# Altium PCB CSC002.pcbdoc (part 1 of 3)
Units mm, origin at the board's own origin, x right, y up, seen from the top; angles counter-clockwise.
Board outline 159.86 x 75.13 mm, 6 copper layers (Top Layer, Mid-Layer 1, Mid-Layer 2, GND, POWER, Bottom Layer), stack 2.494 mm thick; 78 components, 188 nets, 791 pads, 358 vias.
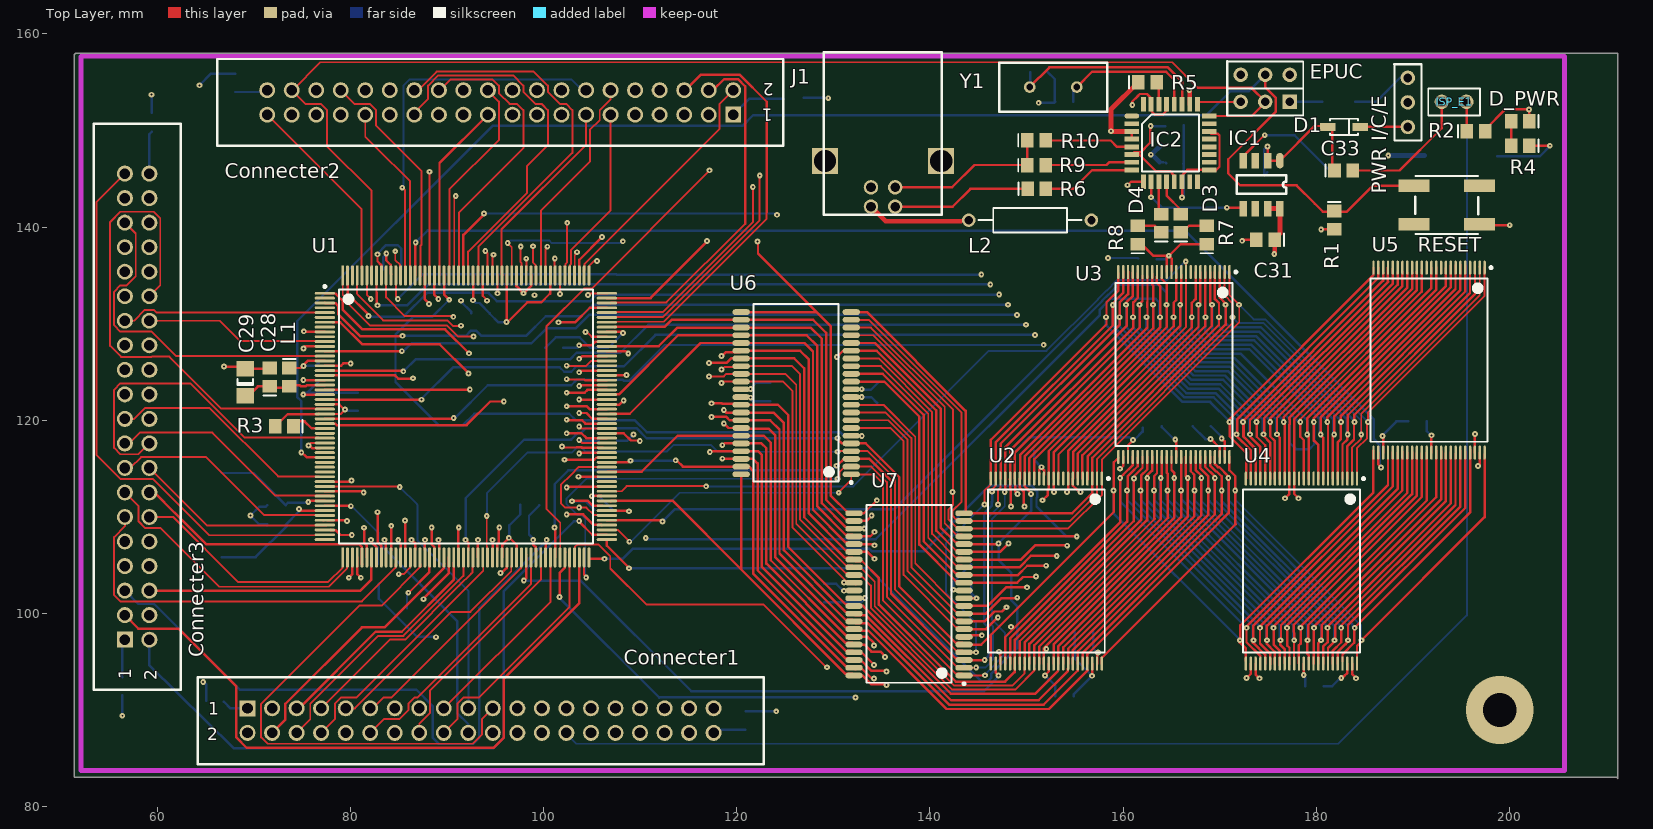
[diagram p0: Top Layer view]
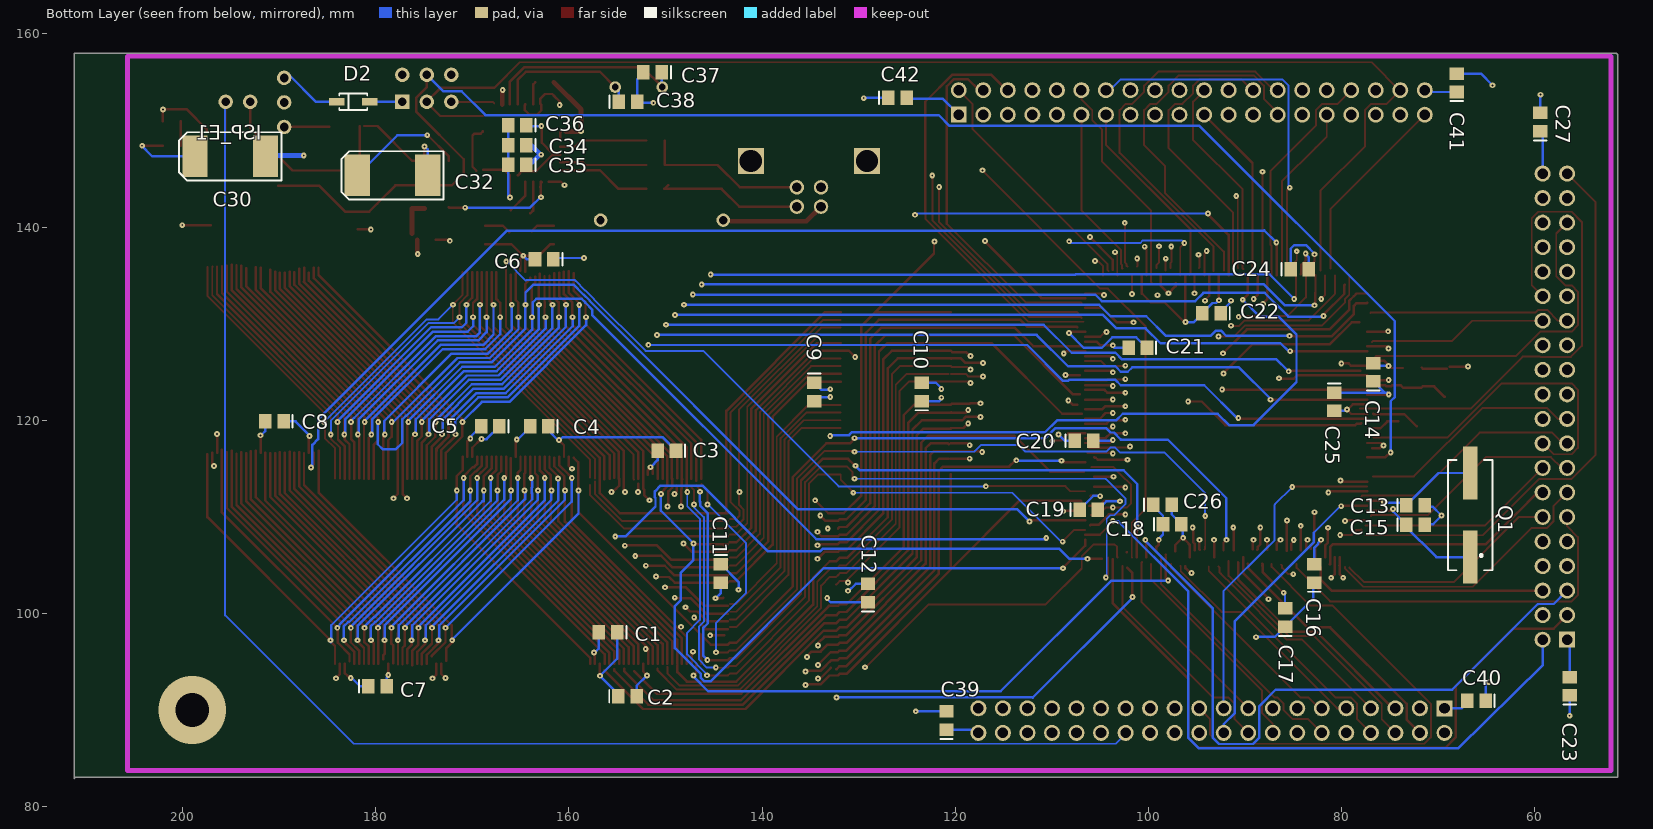
[diagram p1: Bottom Layer view, seen from below]
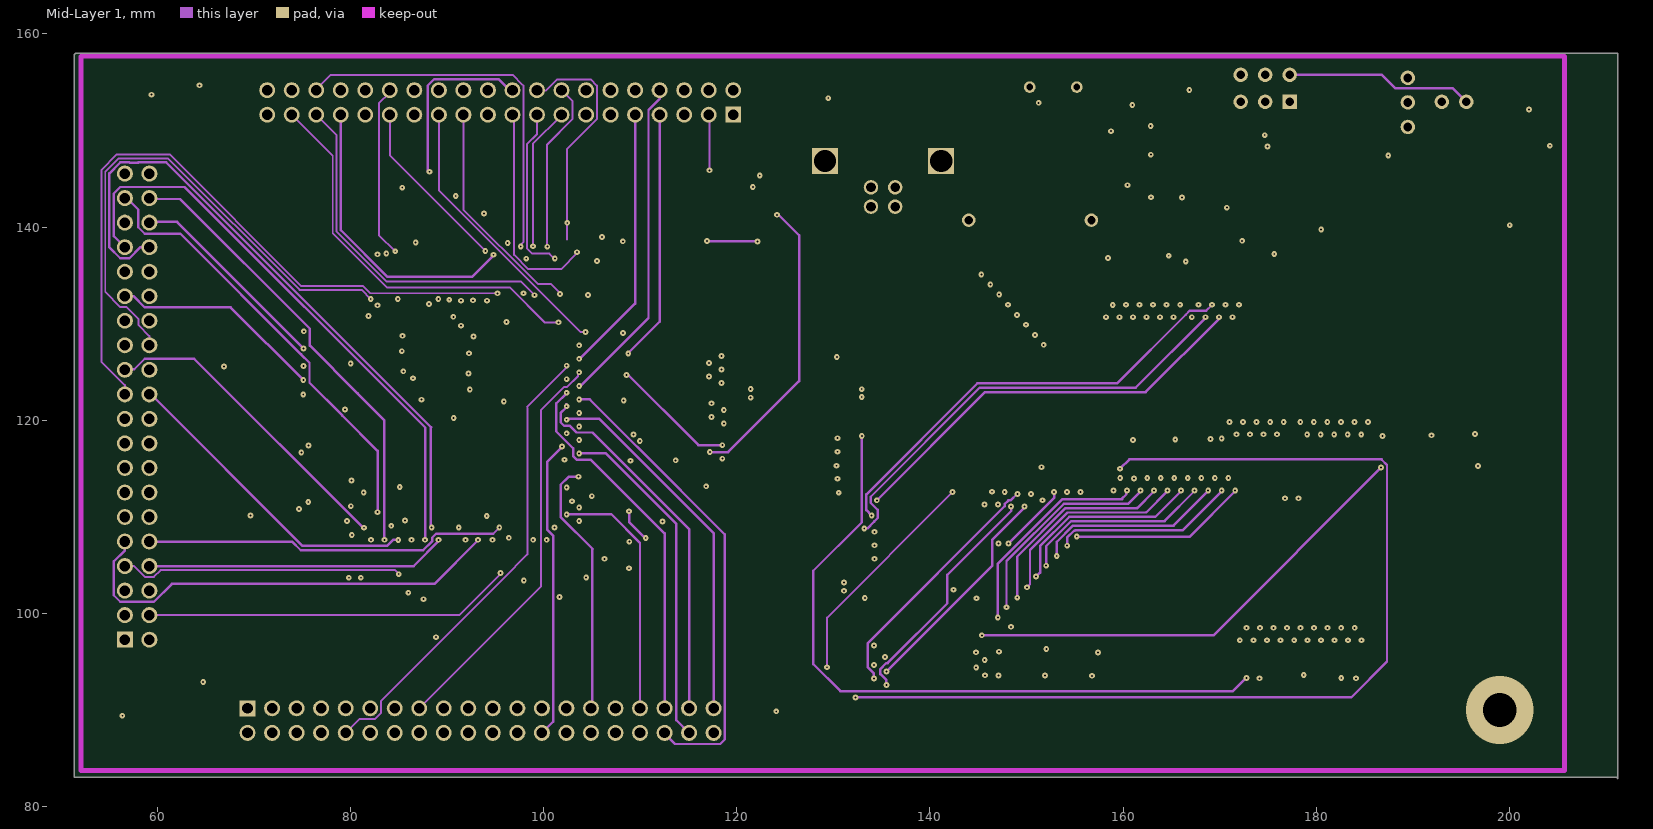
[diagram p2: Mid-Layer 1]
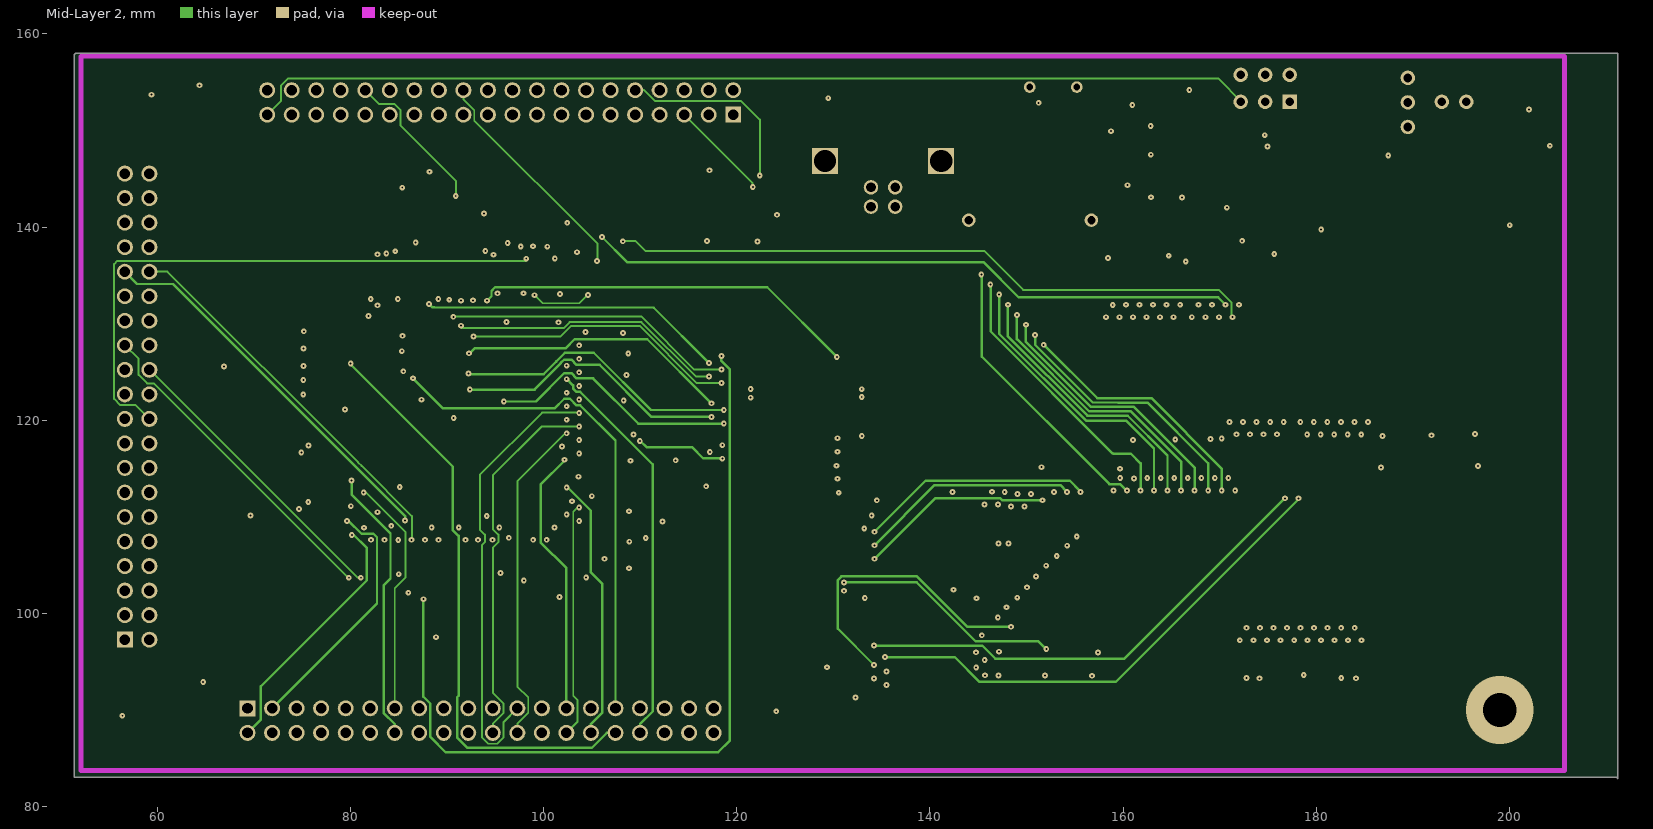
[diagram p3: Mid-Layer 2]
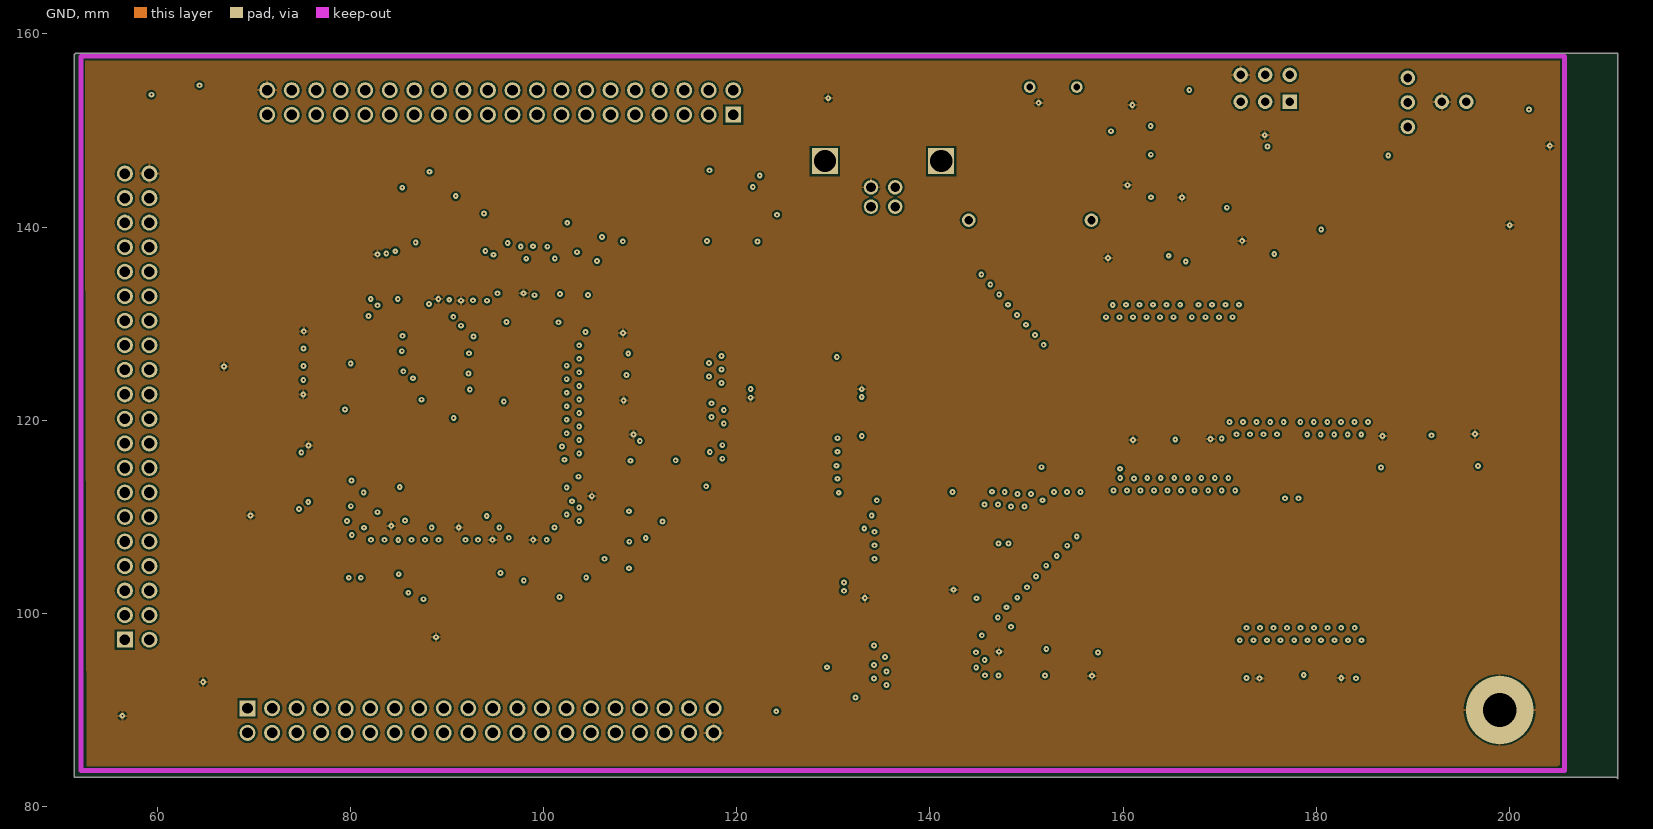
[diagram p4: GND]
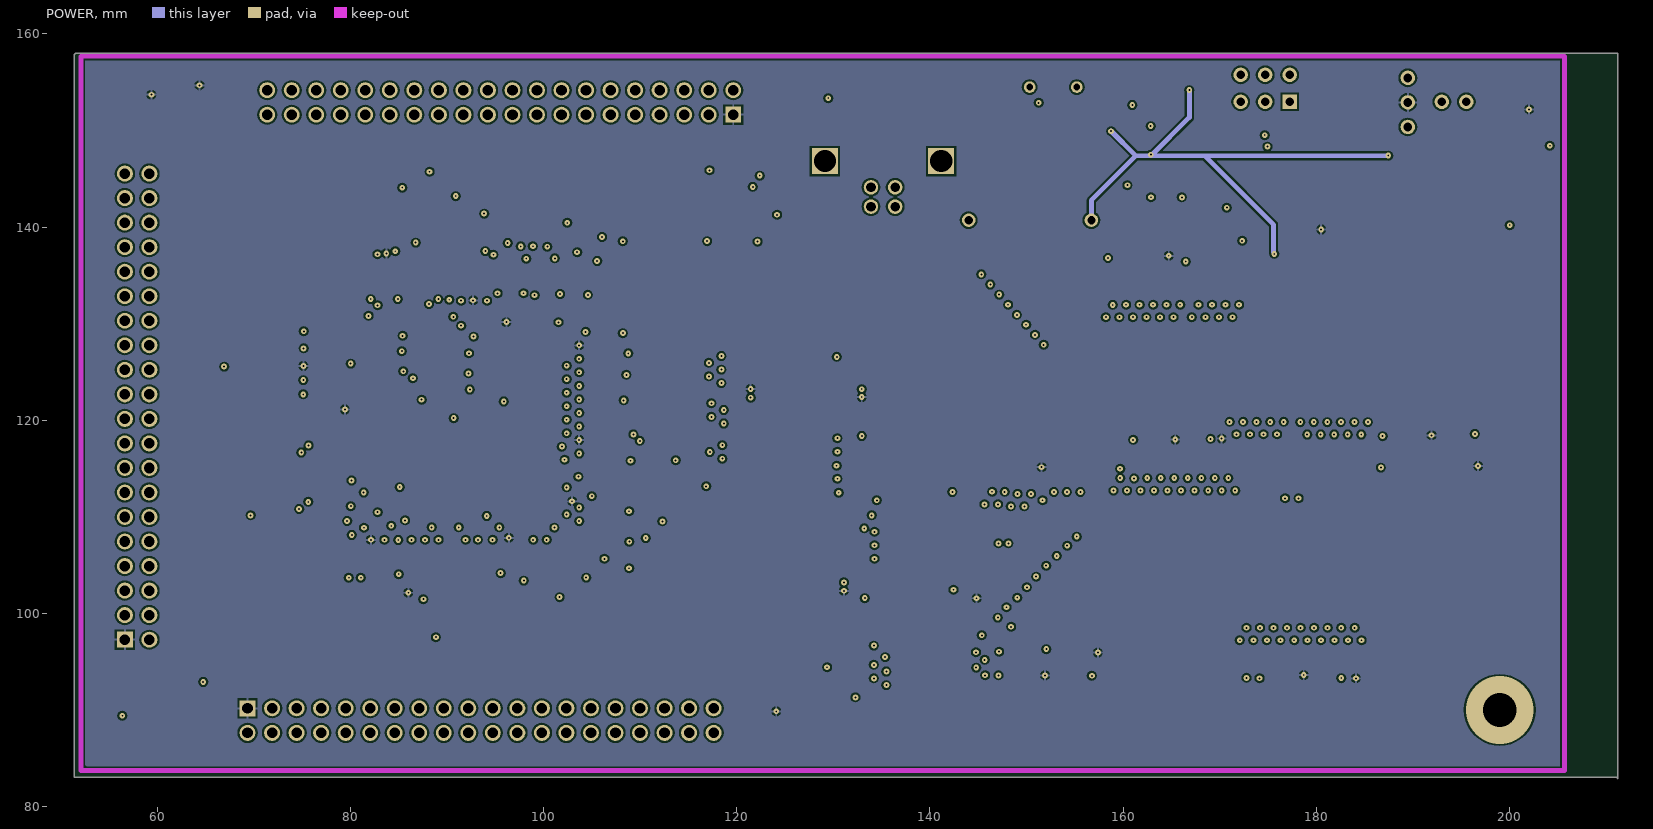
[diagram p5: POWER]

## Layer stack, top to bottom
Top Layer: signal copper 0.0356
Dielectric: core 0.32, FR-4, Dk 4.8
Mid-Layer 1: signal copper 0.0356
Dielectric: prepreg 0.32, FR-4, Dk 4.8
Mid-Layer 2: signal copper 0.0356
Dielectric: core 1, FR-4, Dk 4.8
GND: signal copper 0.0356
Dielectric: prepreg 0.32, FR-4, Dk 4.8
POWER: signal copper 0.0356
Dielectric: core 0.32, FR-4, Dk 4.8
Bottom Layer: signal copper 0.0356

## Board outline
51.38,157.84 51.55,158.01 211.24,158.01 211.24,82.88 211.07,83.05 51.38,83.05

## Design rules (kind name [scope] priority, off if disabled: settings)
Clearance [All] p1: gap=0.2
HoleSize [All] p1: absolutevalues=TRUE maxlimit=5 minlimit=0.2 maxpercent=80.000 minpercent=20.000
MinimumAnnularRing [All] p1: minimumring=0.2
MinimumSolderMaskSliver [All] p1: minsoldermaskwidth=0
PolygonConnect [All] p1: connectstyle=Relief reliefconductorwidth=0.254 reliefentries=4 polygonreliefangle="90 Angle"
RoutingLayers [All] p1: top layer_v5=TRUE mid layer 1_v5=FALSE mid layer 2_v5=FALSE mid layer 3_v5=FALSE mid layer 4_v5=FALSE bottom layer_v5=TRUE
RoutingVias [All] p1: holewidth=0.6 width=1 viastyle="Through Hole" minholewidth=0.15 minwidth=0.25 maxholewidth=5 maxwidth=5
SilkToSilkClearance [All] p1: silktosilkclearance=0.1
SilkscreenOverComponentPads [All] p1: minsilkscreentomaskgap=0
SolderMaskExpansion [All] p1: expansion=0.102
Width [All] p1: maxlimit=0.5 minlimit=0.2 preferedwidth=0.2
23 further rules are at their usual default settings.

## Classes and differential pairs
net class D.[0..15]: D.0 D.1 D.2 D.3 D.4 D.5 D.6 D.7 D.8 D.9 D.10 D.11 D.12 D.13 D.14 D.15
net class A.[0..20]: A.0 A.1 A.2 A.3 A.4 A.5 A.6 A.7 A.8 A.9 A.10 A.11 A.12 A.13 A.14 A.15 A.16 A.17 A.18 A.19 A.20
component class MicroController: C13 C14 C15 C16 C17 C18 C19 C20 C21 C22 C23 C24 C25 C26 C27 C28 C29 C39 C40 C41 C42 Connecter1 Connecter2 Connecter3 EPUC ISP_E1 L1 Q1 R1 R2 R3 RESET U1
component class "Memory bank": C1 C2 C3 C4 C5 C6 C7 C8 C9 C10 C11 C12 U2 U3 U4 U5 U6 U7
component class Power: C30 C31 C32 C33 D1 D2 D.1 D.2 D_PWR IC1 "PWR I/C/E" R4

## Components (designator, comment, footprint, x,y, rotation, side; value= is the part's Value field where it differs from the comment)
C1 "100nF" 0805 155.956,98.044 r0 bottom
C2 "100nF" 0805 153.924,91.44 r180 bottom
C3 "100nF" 0805 149.86,116.84 r0 bottom
C4 "100nF" 0805 163.068,119.38 r0 bottom
C5 "100nF" 0805 168.148,119.38 r0 bottom
C6 "100nF" 0805 162.56,136.652 r0 bottom
C7 "100nF" 0805 179.832,92.456 r180 bottom
C8 "100nF" 0805 190.5,119.888 r0 bottom
C9 "100nF" 0805 134.62,122.936 r270 bottom
C10 "100nF" 0805 123.444,122.936 r90 bottom
C11 "100nF" 0805 144.272,104.14 r270 bottom
C12 "100nF" 0805 129.032,102.108 r90 bottom
C13 "22pF" 0805 72.326,111.202 r180 bottom
C14 "100nF" 0805 76.708,124.968 r90 bottom
C15 "22pF" 0805 72.326,109.17 r180 bottom
C16 "100nF" 0805 82.804,104.14 r90 bottom
C17 "100nF" 0805 85.852,99.568 r90 bottom
C18 "100nF" 0805 97.536,109.22 r180 bottom
C19 "100nF" 0805 106.172,110.744 r180 bottom
C20 "100nF" 0805 106.68,117.856 r180 bottom
C21 "100nF" 0805 101.092,127.508 r0 bottom
C22 "100nF" 0805 93.472,131.064 r0 bottom
C23 "100nF" 0805 56.388,92.456 r90 bottom
C24 "100nF" 0805 84.328,135.636 r180 bottom
C25 "100nF" 0805 80.772,121.92 r270 bottom
C26 "100nF" 0805 98.552,111.252 r180 bottom
C27 "100nF" 0805 59.436,150.876 r90 bottom
C28 "100nF" 0805 71.628,124.46 r90 top
C29 "47uF/6.3V" 1206 69.088,123.952 r90 top
C30 "Cap Pol3" SMDD_E 195.072,147.32 r0 bottom
C31 "Cap Semi" 0805 174.752,138.684 r180 top
C32 "Cap Pol3" smdd_e 178.27,145.352 r0 bottom
C33 "Cap Semi" 0805 182.842,145.86 r0 top
C34 "100nF" 0805 165.35,148.494 r0 bottom
C35 "100nF" 0805 165.35,146.462 r0 bottom
C36 "33nF" 0805 165.35,150.526 r0 bottom
C37 "27pF" 0805 151.346,156.02 r0 bottom
C38 "27pF" 0805 153.886,152.972 r180 bottom
C39 "Cap" 0805 120.904,88.9 r90 bottom
C40 "Cap" 0805 66.04,90.932 r0 bottom
C41 "Cap" 0805 68.072,154.94 r90 bottom
C42 "Cap" 0805 125.984,153.416 r180 bottom
Connecter1 "Header 20X2" "40pins header" 93.472,88.9 r0 top
Connecter2 "Header 20X2" "40pins header" 95.504,152.908 r180 top
Connecter3 "Header 20X2" "40pins header" 57.912,121.412 r90 top
D1 "1N4148" SOD123 182.88,150.368 r0 top
D2 "1N4148" SOD123 182.334,152.972 r0 bottom
D3 "LED" 0805 165.986,140.396 r90 top
D4 "LED" 0805 163.954,140.396 r90 top
D_PWR "LED" 0805 201.13,150.94 r180 top (schematic designator PWR1)
EPUC "Header 3X2" "6pins header" 177.254,152.972 r180 top (schematic designator "Connecter 1")
IC1 "MIC5200" MIC5200-3.3BM 176.238,146.876 r270 top
IC2 "FT232BM" FT232BM 160.906,151.506 r0 top
ISP_E1 "2pins jumper" JUMPER2pins 195.542,152.972 r180 top
J1 "USB B-type" usb-b 136.396,142.124 r180 top
L1 "470nH" 0805 73.66,124.46 r270 top
L2 "Ferrite Bead" AXIAL-0.5 150.368,140.716 r180 top
"PWR I/C/E" "3pins jumper" JUMPER3pins 189.484,150.368 r90 top (schematic designator EXT/PWR1)
Q1 "12.000MHz" HC49/4H_SMX 66.672,110.186 r90 bottom
R1 "47K" 0805 181.864,140.716 r270 top
R2 "22K" 0805 196.558,149.924 r0 top
R3 "10K" 0805 73.152,119.38 r180 top
R4 "560" 0805 201.13,148.4 r180 top
R5 "470" 0805 162.522,155.004 r0 top
R6 "27" 0805 151.064,143.954 r0 top
R7 "220" 0805 168.656,139.192 r90 top
R8 "220" 0805 161.544,139.192 r90 top
R9 "27" 0805 151.046,146.428 r0 top
R10 "1k5" 0805 151.046,148.968 r0 top
RESET "SW-PB" E-BIP-P4/D10 193.51,142.304 r180 top (schematic designator RESET1)
U1 "LPC2468FBD208" SOT459-1_M 91.948,120.396 r0 top
U2 "TE28F320B3" TSOP48_L 152.054,104.382 r270 top
U3 "TE28F320B3" TSOP48_L 165.262,125.776 r270 top
U4 "CY62167DV30LL" TSOP48_L 178.47,104.382 r270 top
U5 "CY62167DV30LL" TSOP48_L 191.678,126.226 r270 top
U6 "FM22L16-55-TG" TSOP2-44_M 126.153,124.8 r180 top
U7 "FM22L16-55-TG" TSOP2-44_M 137.837,103.972 r180 top
Y1 "6MHz" HC49US 150.33,154.496 r0 top

## Footprints (in the part's own frame and the unit in brackets; to place one, negate y for a bottom-side part, rotate by r counter-clockwise, add the part's x,y. Pads: shape width x height; smd on the part's side, far side on the other; paste and mask are expansions set on the pad)
"6pins header" [mm]
  rect 1.5x1.5 hole 0.9: 1(0,0)
  round 1.5 hole 0.9: 2(2.54,0) 3(5.08,0) 4(0,-2.79) 5(2.54,-2.79) 6(5.08,-2.79)
  silkscreen extent -1.4,-4.19 6.48,1.4
"40pins header" [mm]
  rect 1.65x1.65 hole 1.1: 1(-24.13,1.27)
  round 1.65 hole 1.1: 2(-24.13,-1.27) 3(-21.59,1.27) 4(-21.59,-1.27) 5(-19.05,1.27) 6(-19.05,-1.27) 7(-16.51,1.27) 8(-16.51,-1.27) 9(-13.97,1.27) 10(-13.97,-1.27) 11(-11.43,1.27) 12(-11.43,-1.27) 13(-8.89,1.27) 14(-8.89,-1.27) 15(-6.35,1.27) 16(-6.35,-1.27) 17(-3.81,1.27) 18(-3.81,-1.27) 19(-1.27,1.27) 20(-1.27,-1.27) 21(1.27,1.27) 22(1.27,-1.27) 23(3.81,1.27) 24(3.81,-1.27) 25(6.35,1.27) 26(6.35,-1.27) 27(8.89,1.27) 28(8.89,-1.27) 29(11.43,1.27) 30(11.43,-1.27) 31(13.97,1.27) 32(13.97,-1.27) 33(16.51,1.27) 34(16.51,-1.27) 35(19.05,1.27) 36(19.05,-1.27) 37(21.59,1.27) 38(21.59,-1.27) 39(24.13,1.27) 40(24.13,-1.27)
  silkscreen extent -29.3,-4.5 29.3,4.5
0805 [mm] "Chip Capacitor; Body 2.0 x 1.2 mm (LxW typ)"
  rect 1.3x1.5 smd: 1(-0.95,0) 2(0.95,0)
  silkscreen extent -1.9,-0.65 -1.9,0.65
1206 [mm] "Chip Capacitor; Body 3.2 x 1.6 mm (LxW typ)"
  rect 1.6x1.8 smd: 1(-1.4,0) 2(1.4,0)
  silkscreen extent -0.3,-0.8 0.3,0.8
AXIAL-0.5 [mm] "Axial Device, Thru-Hole; 2 Leads; 0.5 in Pin Spacing"
  round 1.4 hole 0.85: 1(-6.35,0) 2(6.35,0)
  silkscreen extent -5.33,-1.27 5.33,1.27
E-BIP-P4/D10 [mm] "Bridge Rectifier; 4 Terminals; Body 9.4 x 9.4 mm (typ); Pitch 5.08 mm"
  rect 3.2x1.3 smd: 0(-3.4,-2) 0(3.4,2) 1(-3.4,2) 2(3.4,-2)
  silkscreen extent -3.25,-3 3.25,3
FT232BM [mm]
  oval 1.5x0.5 smd: 1(0,0)
  rect 1.5x0.5 smd: 2(0,-0.8) 3(0,-1.6) 4(0,-2.4) 5(0,-3.2) 6(0,-4) 7(0,-4.8) 8(0,-5.6) 17(8,-5.6) 18(8,-4.8) 19(8,-4) 20(8,-3.2) 21(8,-2.4) 22(8,-1.6) 23(8,-0.8) 24(8,0)
  rect 0.5x1.5 smd: 9(1.2,-6.8) 10(2,-6.8) 11(2.8,-6.8) 12(3.6,-6.8) 13(4.4,-6.8) 14(5.2,-6.8) 15(6,-6.8) 16(6.8,-6.8) 25(6.8,1.2) 26(6,1.2) 27(5.2,1.2) 28(4.4,1.2) 29(3.6,1.2) 30(2.8,1.2) 31(2,1.2) 32(1.2,1.2)
  silkscreen extent 1.03,-5.77 6.97,0.17
HC49/4H_SMX [mm]
  rect 5.5x1.5 smd: 1(-4.35,0) 2(4.35,0)
  silkscreen extent -5.71,-2.29 5.71,2.29
HC49US [mm]
  round 1.2 hole 0.7: 1(0,0) 2(4.88,0)
  silkscreen extent -3.15,-2.54 8.03,2.54
JUMPER2pins [mm]
  round 1.5 hole 0.9: 1(0,0) 2(2.54,0)
  silkscreen extent -1.4,-1.4 3.94,1.4
JUMPER3pins [mm]
  round 1.5 hole 0.9: 1(0,0) 2(2.54,0) 3(5.08,0)
  silkscreen extent -1.4,-1.4 6.48,1.4
MIC5200-3.3BM [mil]
  oval 62.99x30 smd: 1(0,0)
  rect 62.99x30 smd: 2(0,-50) 3(0,-100) 4(0,-150) 5(195,-150) 6(195,-100) 7(195,-50) 8(195,0)
  silkscreen extent 60,-175 135,25
SMDD_E [mm]
  rect 2.6x4.3 smd: 1(-3.65,0) 2(3.65,0)
  silkscreen extent -5.3,-2.5 5.3,2.5
smdd_e [mm]
  rect 2.6x4.3 smd: 1(-3.65,0) 2(3.65,0)
  silkscreen extent -5.3,-2.5 5.3,2.5
SOD123 [mm] "SOD-123; 2 Leads; Body 2.7 x 1.6 mm, (LxW)"
  rect 1.6x0.8 smd: 1(-1.7,0) 2(1.7,0)
  silkscreen extent -1.45,-0.85 1.45,0.85
SOT459-1_M [mm] "Thin QFP, 208-Leads, Body 28x28mm, Pitch 0.5mm, IPC Low Density"
  oval 2.1x0.3 smd: 1(-14.6,12.75) 2(-14.6,12.25) 3(-14.6,11.75) 4(-14.6,11.25) 5(-14.6,10.75) 6(-14.6,10.25) 7(-14.6,9.75) 8(-14.6,9.25) 9(-14.6,8.75) 10(-14.6,8.25) 11(-14.6,7.75) 12(-14.6,7.25) 13(-14.6,6.75) 14(-14.6,6.25) 15(-14.6,5.75) 16(-14.6,5.25) 17(-14.6,4.75) 18(-14.6,4.25) 19(-14.6,3.75) 20(-14.6,3.25) 21(-14.6,2.75) 22(-14.6,2.25) 23(-14.6,1.75) 24(-14.6,1.25) 25(-14.6,0.75) 26(-14.6,0.25) 27(-14.6,-0.25) 28(-14.6,-0.75) 29(-14.6,-1.25) 30(-14.6,-1.75) 31(-14.6,-2.25) 32(-14.6,-2.75) 33(-14.6,-3.25) 34(-14.6,-3.75) 35(-14.6,-4.25) 36(-14.6,-4.75) 37(-14.6,-5.25) 38(-14.6,-5.75) 39(-14.6,-6.25) 40(-14.6,-6.75) 41(-14.6,-7.25) 42(-14.6,-7.75) 43(-14.6,-8.25) 44(-14.6,-8.75) 45(-14.6,-9.25) 46(-14.6,-9.75) 47(-14.6,-10.25) 48(-14.6,-10.75) 49(-14.6,-11.25) 50(-14.6,-11.75) 51(-14.6,-12.25) 52(-14.6,-12.75) 105(14.6,-12.75) 106(14.6,-12.25) 107(14.6,-11.75) 108(14.6,-11.25) 109(14.6,-10.75) 110(14.6,-10.25) 111(14.6,-9.75) 112(14.6,-9.25) 113(14.6,-8.75) 114(14.6,-8.25) 115(14.6,-7.75) 116(14.6,-7.25) 117(14.6,-6.75) 118(14.6,-6.25) 119(14.6,-5.75) 120(14.6,-5.25) 121(14.6,-4.75) 122(14.6,-4.25) 123(14.6,-3.75) 124(14.6,-3.25) 125(14.6,-2.75) 126(14.6,-2.25) 127(14.6,-1.75) 128(14.6,-1.25) 129(14.6,-0.75) 130(14.6,-0.25) 131(14.6,0.25) 132(14.6,0.75) 133(14.6,1.25) 134(14.6,1.75) 135(14.6,2.25) 136(14.6,2.75) 137(14.6,3.25) 138(14.6,3.75) 139(14.6,4.25) 140(14.6,4.75) 141(14.6,5.25) 142(14.6,5.75) 143(14.6,6.25) 144(14.6,6.75) 145(14.6,7.25) 146(14.6,7.75) 147(14.6,8.25) 148(14.6,8.75) 149(14.6,9.25) 150(14.6,9.75) 151(14.6,10.25) 152(14.6,10.75) 153(14.6,11.25) 154(14.6,11.75) 155(14.6,12.25) 156(14.6,12.75)
  oval 0.3x2.1 smd: 53(-12.75,-14.6) 54(-12.25,-14.6) 55(-11.75,-14.6) 56(-11.25,-14.6) 57(-10.75,-14.6) 58(-10.25,-14.6) 59(-9.75,-14.6) 60(-9.25,-14.6) 61(-8.75,-14.6) 62(-8.25,-14.6) 63(-7.75,-14.6) 64(-7.25,-14.6) 65(-6.75,-14.6) 66(-6.25,-14.6) 67(-5.75,-14.6) 68(-5.25,-14.6) 69(-4.75,-14.6) 70(-4.25,-14.6) 71(-3.75,-14.6) 72(-3.25,-14.6) 73(-2.75,-14.6) 74(-2.25,-14.6) 75(-1.75,-14.6) 76(-1.25,-14.6) 77(-0.75,-14.6) 78(-0.25,-14.6) 79(0.25,-14.6) 80(0.75,-14.6) 81(1.25,-14.6) 82(1.75,-14.6) 83(2.25,-14.6) 84(2.75,-14.6) 85(3.25,-14.6) 86(3.75,-14.6) 87(4.25,-14.6) 88(4.75,-14.6) 89(5.25,-14.6) 90(5.75,-14.6) 91(6.25,-14.6) 92(6.75,-14.6) 93(7.25,-14.6) 94(7.75,-14.6) 95(8.25,-14.6) 96(8.75,-14.6) 97(9.25,-14.6) 98(9.75,-14.6) 99(10.25,-14.6) 100(10.75,-14.6) 101(11.25,-14.6) 102(11.75,-14.6) 103(12.25,-14.6) 104(12.75,-14.6) 157(12.75,14.6) 158(12.25,14.6) 159(11.75,14.6) 160(11.25,14.6) 161(10.75,14.6) 162(10.25,14.6) 163(9.75,14.6) 164(9.25,14.6) 165(8.75,14.6) 166(8.25,14.6) 167(7.75,14.6) 168(7.25,14.6) 169(6.75,14.6) 170(6.25,14.6) 171(5.75,14.6) 172(5.25,14.6) 173(4.75,14.6) 174(4.25,14.6) 175(3.75,14.6) 176(3.25,14.6) 177(2.75,14.6) 178(2.25,14.6) 179(1.75,14.6) 180(1.25,14.6) 181(0.75,14.6) 182(0.25,14.6) 183(-0.25,14.6) 184(-0.75,14.6) 185(-1.25,14.6) 186(-1.75,14.6) 187(-2.25,14.6) 188(-2.75,14.6) 189(-3.25,14.6) 190(-3.75,14.6) 191(-4.25,14.6) 192(-4.75,14.6) 193(-5.25,14.6) 194(-5.75,14.6) 195(-6.25,14.6) 196(-6.75,14.6) 197(-7.25,14.6) 198(-7.75,14.6) 199(-8.25,14.6) 200(-8.75,14.6) 201(-9.25,14.6) 202(-9.75,14.6) 203(-10.25,14.6) 204(-10.75,14.6) 205(-11.25,14.6) 206(-11.75,14.6) 207(-12.25,14.6) 208(-12.75,14.6)
  silkscreen extent -14.72,-13.15 13.15,13.57, body extent -14,-14 14,14, height 1.6
TSOP2-44_M [mm]
  oval 1.8x0.6 smd: 1(-5.7,10.4) 2(-5.7,9.6) 3(-5.7,8.8) 4(-5.7,8) 5(-5.7,7.2) 6(-5.7,6.4) 7(-5.7,5.6) 8(-5.7,4.8) 9(-5.7,4) 10(-5.7,3.2) 11(-5.7,2.4) 12(-5.7,1.6) 13(-5.7,0.8) 14(-5.7,0) 15(-5.7,-0.8) 16(-5.7,-1.6) 17(-5.7,-2.4) 18(-5.7,-3.2) 19(-5.7,-4) 20(-5.7,-4.8) 21(-5.7,-5.6) 22(-5.7,-6.4) 23(5.7,-6.4) 24(5.7,-5.6) 25(5.7,-4.8) 26(5.7,-4) 27(5.7,-3.2) 28(5.7,-2.4) 29(5.7,-1.6) 30(5.7,-0.8) 31(5.7,0) 32(5.7,0.8) 33(5.7,1.6) 34(5.7,2.4) 35(5.7,3.2) 36(5.7,4) 37(5.7,4.8) 38(5.7,5.6) 39(5.7,6.4) 40(5.7,7.2) 41(5.7,8) 42(5.7,8.8) 43(5.7,9.6) 44(5.7,10.4)
  silkscreen extent -5.82,-7.25 4.4,11.37, body extent -5.08,-7.25 5.08,11.11, height 1.2
TSOP48_L [mm] "TSSOP, 48-Leads, Body 12x18.4mm, Pitch 0.5mm, IPC High Density"
  oval 1.45x0.25 smd: 1(-9.575,5.75) 2(-9.575,5.25) 3(-9.575,4.75) 4(-9.575,4.25) 5(-9.575,3.75) 6(-9.575,3.25) 7(-9.575,2.75) 8(-9.575,2.25) 9(-9.575,1.75) 10(-9.575,1.25) 11(-9.575,0.75) 12(-9.575,0.25) 13(-9.575,-0.25) 14(-9.575,-0.75) 15(-9.575,-1.25) 16(-9.575,-1.75) 17(-9.575,-2.25) 18(-9.575,-2.75) 19(-9.575,-3.25) 20(-9.575,-3.75) 21(-9.575,-4.25) 22(-9.575,-4.75) 23(-9.575,-5.25) 24(-9.575,-5.75) 25(9.575,-5.75) 26(9.575,-5.25) 27(9.575,-4.75) 28(9.575,-4.25) 29(9.575,-3.75) 30(9.575,-3.25) 31(9.575,-2.75) 32(9.575,-2.25) 33(9.575,-1.75) 34(9.575,-1.25) 35(9.575,-0.75) 36(9.575,-0.25) 37(9.575,0.25) 38(9.575,0.75) 39(9.575,1.25) 40(9.575,1.75) 41(9.575,2.25) 42(9.575,2.75) 43(9.575,3.25) 44(9.575,3.75) 45(9.575,4.25) 46(9.575,4.75) 47(9.575,5.25) 48(9.575,5.75)
  silkscreen extent -9.7,-6.05 8.45,6.55, body extent -9.25,-6.05 9.25,6.05, height 1.2
usb-b [mm]
  round 1.5 hole 1: 1(2.5,0) 2(0,0) 3(0,-2) 4(2.5,-2)
  rect 2.7x2.7 hole 2.3: 5(-4.77,-4.71) 6(7.27,-4.71)
  silkscreen extent -4.83,-16 7.39,0.85

## Part data
C1 C2 C3 C4 C5 C6 C7 C8 C9 C10 C11 C12 C13 C14 C15 C16 C17 C18 C19 C20 C21 C22 C23 C24 C25 C26 C27 C28: library part Cap, "Capacitor"
C29: library part "Cap Pol3", "Polarized Capacitor (Surface Mount)"
C30 C32: "Polarized Capacitor (Surface Mount)"
C31 C33: "Capacitor (Semiconductor SIM Model)"
C34 C35 C36 C37 C38: library part "Cap Semi", "Capacitor (Semiconductor SIM Model)"
C39 C40 C41 C42: "Capacitor"
Connecter1 Connecter2 Connecter3: "Header, 20-Pin, Dual row"
D1 D2: "High Conductance Fast Diode"
D3 D4: library part LED2, "Typical RED, GREEN, YELLOW, AMBER GaAs LED"
D_PWR: library part LED0, "Typical INFRARED GaAs LED"
EPUC: "Header, 5-Pin, Dual row"
IC1: "MIC5200-3.3BM 3.3V 100mA LDO Voltage Regulator"
IC2: "FT232BM USB UART (Usb->Serial) IC"
J1: library part "Header 4", "Header, 4-Pin"
L1: library part Inductor, "Inductor"
L2: library part Res2
Q1: library part "C.O. 2pins", "Crystal Oscillator"
R1 R2 R3 R4: library part Res2, "Resistor"
R5 R6 R7 R8 R9 R10: library part Res1, "Resistor"
RESET: "Switch"
U1: "ARM7 16/32-Bit Microcontroller, 512KB Flash, 98KB RAM, 208-Lead LQFP"
U2 U3: "32-Mbit (2M x 16) Advanced Boot Block Flash Memory"
U4 U5: "16-Mbit (1M x 16) Static RAM"
U6 U7: "FRAM, 2MB, 3V, 60NS, 44TSOP2"
Y1: library part XTAL, "Crystal Oscillator"

## Via types
v1: diameter 0.6, hole 0.2, Top Layer to Bottom Layer, 354 vias
v2: diameter 0.6/0.6/0.6/0.6/0.6/0.6 (per signal layer), hole 0.2, Top Layer to Bottom Layer, 1 vias
v3: diameter 0.6, hole 0.2, Top Layer to Bottom Layer, tented bottom, 1 vias
v4: diameter 0.6, hole 0.2, Top Layer to Bottom Layer, tented top, 1 vias
v5: diameter 7, hole 3.5, Top Layer to Bottom Layer, 1 vias

## Nets (pads, with @x,y where several pads share a name; then routed paths per layer and width w, separated by ;. In a path a pad name is that pad's centre, name@x,y a point inside that pad or via, vN(x,y) a via of type N, cw(c..) or ccw(c..) an arc to the next point about the centre after c; other vN are vias at no path point)
3.3V: "PWR I/C/E.2" C1.2 C2.2 C3.2 C4.2 C5.2 C6.2 C7.2 C8.2 C9.2 C10.2 C11.2 C12.2 C14.2 C16.2 C17.2 C18.2 C19.2 C20.2 C21.2 C22.2 C23.2 C24.2 C25.2 C26.2 C27.2 C39.2 C40.2 C41.2 C42.2 Connecter1.1 Connecter2.1 Connecter3.1 D_PWR.1 L1.1 R1.2 R2.2 R3.2 R7.1 R8.1 U1.15 U1.24 U1.26 U1.60 U1.71 U1.86 U1.89 U1.112 U1.125 U1.146 U1.165 U1.174 U1.181 U1.198 U2.13 U2.14 U2.37 U2.47 U3.13 U3.14 U3.37 U3.47 U4.37 U4.47 U5.37 U5.47 U6.11 U6.33 U7.11 U7.33 | length 153.9
  Top Layer w0.254: R3.2@72.202,119.38 72.24,119.38 73.483,120.623 76.684,120.623 U1.26@76.73,120.669 ; L1.1@73.66,125.41 74.84,125.41 v1@75.09,125.66 ; v1@75.15,125.74 75.556,126.146 U1.15@77.348,126.146 ; U1.26@77.348,120.646 78.996,120.646 v1@79.44,121.09 ; U1.24@77.348,121.646 78.834,121.646 79.36,121.12 v1@79.38,121.12 ; v1@82.07,107.61 82.07,107.45 82.347,107.173 82.396,107.173 82.698,106.871 U1.60@82.698,105.796 ; v1(83.71,137.27) 83.71,136.559 84.175,136.094 84.175,135.146 U1.198@84.221,135.1 ; v1(85.99,102.14) 86.04,102.14 88.175,104.275 88.175,105.104 U1.71@88.221,105.15 ; U1.71@88.175,104.884 U1.71@88.221,104.93 ; v1@92.698,132.5 U1.181@92.698,134.996 ; U1.86@95.698,105.796 95.698,107.069 95.804,107.175 95.804,107.214 v1@96.41,107.82 ; v1@96.03,130.16 96.198,130.328 U1.174@96.198,134.996 ; v1@96.19,130.09 98.31,132.21 99.75,132.21 100.638,133.098 100.698,133.098 U1.165@100.698,134.996 ; v1(96.4,107.83) 96.47,107.83 97.221,107.079 U1.89@97.221,106.44 ; v1(102.95,111.61) v1@102.91,111.65 ; v1@103.67,117.98 104.004,117.646 U1.125@106.548,117.646 ; v1@103.7,127.75 104.97,127.75 105.366,128.146 U1.146@106.548,128.146 ; U1.112@106.12,111.123 106.074,111.169 105.074,111.169 104.593,111.65 v1@102.91,111.65 ; U7.11@144.02,101.6 144.05,101.57 v1(144.83,101.57) ; U2.14@151.3,114.47 151.3,114.88 v1(151.56,115.14) 151.56,115.07 151.82,114.81 U2.13@151.82,114.37 ; v1@151.85,93.55 152.304,94.004 U2.37@152.304,94.808 ; U2.47@157.304,94.808 v1@157.304,95.834 ; R8.1@161.544,138.242 161.908,138.242 163.1,137.05 v1@164.7,137.05 ; U3.14@164.512,135.351 164.512,136.782 164.76,137.03 164.76,136.99 165.02,136.73 U3.13@165.02,135.47 ; v1@164.67,137 164.73,137 165.972,138.242 R7.1@168.656,138.242 ; v1@165.46,118.02 165.512,117.968 U3.37@165.512,116.202 ; v1@170.22,118.11 170.512,117.818 U3.47@170.512,116.202 ; U4.37@178.72,94.808 178.72,93.6 v1@178.75,93.57 ; 180.831,139.766 R1.2@181.864,139.766 ; U4.47@183.72,94.808 183.72,93.72 v1@184.14,93.3 ; U5.37@191.928,116.652 191.928,118.398 v1@191.96,118.43 ; v1@196.928,115.46 U5.47@196.928,116.652 ; R2.2@197.508,149.924 197.508,150.13 199.558,152.18 v1@201.98,152.18 ; v1@202.05,152.16 202.08,152.13 D_PWR.1@202.08,150.94 ; v1@102.91,111.65 102.87,111.65 v1@102.91,111.65
  Bottom Layer w0.254: C23.2@56.388,93.406 56.388,97.118 Connecter3.1@56.51,97.24 ; C27.2@59.436,151.826 v1@59.436,153.704 ; v1@64.405,154.735 65.56,155.89 C41.2@68.072,155.89 ; C40.2@66.88,90.87 67.58,90.17 Connecter1.1@69.342,90.17 ; v1@75.09,125.65 76.44,125.65 C14.2@76.708,125.918 ; v1@79.31,121.12 79.46,120.97 C25.2@80.772,120.97 ; v1@82.16,107.57 82.439,107.291 82.439,107.172 82.804,106.807 C16.2@82.804,105.09 ; C24.2@83.378,135.636 83.378,136.868 v1@83.76,137.25 ; C17.2@85.852,100.518 85.852,102.072 v1@85.89,102.11 ; v1@92.73,132.42 93.009,132.141 93.345,132.141 C22.2@94.422,131.064 ; C22.2@94.42,131.03 95.31,130.14 96.13,130.14 v1(96.15,130.16) ; v1@96.44,107.94 96.44,109.11 97.602,110.272 C26.2@97.602,111.252 ; C21.2@102.042,127.508 103.528,127.508 v1@103.73,127.71 ; v1@102.98,111.6 104.366,111.6 C19.2@105.222,110.744 ; v1@103.67,117.98 103.794,117.856 C20.2@105.73,117.856 ; Connecter2.1@119.634,151.638 121.306,153.31 C42.2@124.89,153.31 ; C39.2@120.904,89.85 124.19,89.85 v1@124.2,89.86 ; v1@121.28,123.16 122.006,123.886 C10.2@123.444,123.886 ; C12.2@129.032,103.058 130.302,103.058 v1@131.05,102.31 ; v1(132.94,122.4) 133.92,122.4 C9.2@134.53,121.79 ; C11.2@144.272,103.19 144.272,102.118 v1@144.85,101.54 ; C3.2@150.81,116.84 150.81,115.87 v1@151.45,115.23 ; v1@151.98,93.52 152.974,92.526 C2.2@152.974,91.44 ; C1.2@156.906,98.044 156.906,96.354 v1@157.36,95.9 ; C6.2@163.51,136.652 164.332,136.652 v1@164.73,137.05 ; C4.2@164.018,119.38 164.018,119.272 v1@165.36,117.93 ; C5.2@169.098,119.38 170.13,118.348 v1@170.13,118 ; v1@178.67,93.57 178.882,93.358 C7.2@178.882,92.456 ; C8.2@191.45,119.888 191.45,118.86 v1@191.81,118.5
  other v1: 124.09,89.86 184.11,93.28 151.92,93.58 178.71,93.61 157.39,95.94 131.09,102.34 82.12,107.62 196.76,115.26 103.68,117.96 165.4,118 170.21,118.1 191.94,118.44 79.42,121.11 121.44,123.25 75.13,125.62 103.68,127.76 92.7,132.42 164.73,137.03 180.51,139.75 202.04,152.19 59.39,153.71 64.37,154.68
A.0: U1.79 U2.25 U3.25 U4.25 U5.25 U6.5 U7.5 | length 154.8
  Top Layer w0.254: v1(91.92,107.62) 92.221,107.319 U1.79@92.221,106.55 ; v1@130.4,118.09 130.89,117.6 133.35,117.6 136.825,114.126 136.825,102.797 142.677,96.945 143.364,96.945 U7.5@143.537,96.772 145.312,96.772 146.304,97.764 ; U2.25@146.304,94.808 146.304,97.764 ; 146.48,97.94 146.304,97.764 ; U3.25@159.52,116.12 159.037,115.637 159.037,110.513 146.304,97.78 146.304,97.764 ; U4.25@172.71,95.1 172.71,96.35 172.09,96.97 v1(172.09,97.22) 172.153,97.283 172.153,98.77 185.92,112.537 185.92,116.86 U5.25@185.93,116.87
  Bottom Layer w0.254: v1@91.925,107.6 91.925,111.925 97.99,117.99 102.85,117.99 ; 102.856,118.023 103.566,118.733 103.94,118.733 104.387,119.18 109.627,119.18 110.667,118.14 v1(130.42,118.14) ; v1(159.01,112.72) 159.01,110.36 v1@172.04,97.33
A.1: U1.83 U2.24 U3.24 U4.24 U5.24 U6.4 U7.4 | length 168.5
  Top Layer w0.2: v1(94.11,110.09) 94.11,106.92 94.148,106.882 94.148,106.652 U1.83@94.175,106.625 ; v1@130.59,116.8 U6.4@131.853,116.8 133.547,116.8 136.398,113.949 136.398,102.463 142.688,96.172 143.337,96.172 U7.4@143.537,95.972 v1@144.808,95.972 ; v1(145.65,111.29) 145.65,112.68 146.29,113.32 U2.24@146.29,113.41
  Top Layer w0.254: U2.24@146.304,113.957 146.304,117.96 158.283,129.939 158.283,132.22 159.512,133.448 U3.24@159.512,135.198 ; v1(171.03,119.83) 171.03,118.34 172.74,116.63 U4.24@172.74,113.99 ; 171.04,119.46 171.04,120.14 185.928,135.028 U5.24@185.928,135.801
  Bottom Layer w0.2: v1@94.125,110.075 94.125,112.45 98.325,116.65 102.921,116.65 103.431,117.16 103.929,117.16 104.309,116.78 112.751,116.78 ; 112.775,116.775 113.425,117.425 117.344,117.425 117.95,116.819 117.956,116.819 118.035,116.74 v1(130.42,116.74) ; v1(144.77,95.97) 144.77,99.01 141.68,102.1 141.68,107.31 v1@145.65,111.28
  Bottom Layer w0.254: v1(158.22,130.67) 158.22,129.85 166.162,121.908 169.012,121.908 v1@171.04,119.88
A.2: U1.97 U2.23 U3.23 U4.23 U5.23 U6.3 U7.3 | length 163.6
  Top Layer w0.2: 146.48,112.91 146.796,113.226
  Top Layer w0.254: v1@101.125,108.95 101.198,108.877 U1.97@101.198,105.796 ; v1@130.46,115.36 131.1,116 133.743,116 135.971,113.772 135.971,102.051 142.677,95.345 143.364,95.345 U7.3@143.537,95.172 v1@145.632,95.172 ; v1(146.44,112.6) v1@146.44,112.854 ; U2.23@146.804,113.707 U2.23@146.804,113.957 146.804,117.687 158.93,129.813 158.93,132.112 160.03,133.212 U3.23@160.03,135.44 ; v1@171.72,118.51 171.74,118.49 171.74,118.38 173.22,116.9 U4.23@173.22,113.957 ; v1@171.74,118.5 171.803,118.563 171.803,120.09 186.428,134.715 U5.23@186.428,135.801
  Bottom Layer w0.254: v1@101.15,108.975 101.15,113.4 102.55,114.8 129.88,114.8 130.34,115.26 v1(130.34,115.29) ; 145.603,98.979 145.603,110.356 146.423,111.176 146.423,111.55 146.44,111.567 v1@146.44,112.56 ; 145.651,98.931 146.103,98.479 146.103,95.623 v1(145.67,95.19) ; v1(158.93,131.94) 158.91,131.96 158.91,129.802 166.35,122.362 169.385,122.362 171.767,119.98 171.767,118.587 v1@171.75,118.57
  other v1: 101.12,108.88 171.74,118.54
A.3: U1.103 U2.22 U3.22 U4.22 U5.22 U6.2 U7.2 | length 167.9
  Top Layer w0.2: U1.103@104.198,105.796 104.198,103.977 v1@104.425,103.75 ; v1@130.4,113.96 130.653,114.213 130.653,114.649 131.204,115.2 133.939,115.2 135.544,113.595 135.544,101.717 142.688,94.572 143.337,94.572 U7.2@143.537,94.372 v1@144.798,94.372 ; v1(147.05,111.29) 147.05,112.78 147.31,113.04 147.31,113.219
  Top Layer w0.254: U2.22@147.32,113.96 147.32,117.561 159.64,129.881 159.64,132.18 160.52,133.06 U3.22@160.52,135.39 ; v1@159.62,130.541 v1(159.62,130.67) ; v1@172.45,119.87 172.45,118.33 172.513,118.267 ; 173.674,116.822 173.674,117.088 172.513,118.249 172.513,118.267 ; U4.22@173.72,113.957 173.72,117.06 172.513,118.267 ; U5.22@186.928,135.293 186.928,134.46 172.513,120.045 172.513,118.267
  Bottom Layer w0.2: v1@104.31,103.815 104.31,109.779 103.929,110.16 103.551,110.16 102.35,111.361 102.35,111.859 104.425,113.934 ; 104.425,113.94 v1(130.42,113.94) ; v1(144.79,94.39) 145.719,94.39 146.53,95.201 146.53,98.656 146.03,99.156 146.03,109.966 147.01,110.946 v1@147.01,111.22
  Bottom Layer w0.254: v1(159.62,130.67) 159.62,129.734 166.538,122.816 169.573,122.816 172.43,119.959 v1@172.43,119.87
  other v1: 104.41,103.71 172.43,119.83
A.4: U1.107 U2.21 U3.21 U4.21 U5.21 U6.1 U7.1 | length 156.2
  Top Layer w0.2: U1.107@106.548,108.646 107.654,108.646 v1@108.85,107.45 ; v1@130.53,112.5 131.853,113.823 U6.1@131.853,114.4 134.173,114.4 135.144,113.429 135.144,101.317 142.688,93.772 143.337,93.772 U7.1@143.537,93.572 145.752,93.572 v1@145.77,93.59
  Top Layer w0.254: v1@147.79,112.59 147.804,112.604 U2.21@147.804,113.957 ; U2.21@147.79,113.92 147.79,117.196 160.37,129.776 160.37,132.234 161.02,132.884 U3.21@161.02,135.28 ; v1@160.26,131.97 v1@160.332,132.042 ; v1(173.14,118.54) 173.14,120.03 187.43,134.32 ; v1@173.15,118.48 173.15,118.31 174.22,117.24 U4.21@174.22,113.957 ; U5.21@187.428,135.801 187.428,134.372 187.44,134.36
  Mid-Layer 1 w0.2: v1@145.68,93.61 v1@145.68,93.711
  Bottom Layer w0.2: v1@109.125,107.525 114.09,112.49 v1(130.56,112.49) ; v1@145.68,93.711 145.721,93.711 147.76,95.75 147.76,97.991 146.43,99.321 146.43,109.8 147.75,111.12 v1@147.75,112.49
  Bottom Layer w0.254: v1(160.31,131.96) 160.31,129.686 166.726,123.27 169.877,123.27 173.057,120.09 173.057,118.613 v1@173.13,118.54
  other v1: 145.71,93.59 108.875,107.425 147.74,112.58
A.5: U1.113 U2.20 U3.20 U4.20 U5.20 U6.44 U7.44 | length 146.6
  Top Layer w0.254: U1.113@106.95,111.625 106.994,111.669 107.646,111.669 107.652,111.675 113.347,111.675 120.453,104.569 ; U6.44@120.453,114.4 120.453,104.569 ; v1@135.53,92.643 133.94,92.643 133.011,93.572 U7.44@132.137,93.572 131.964,93.745 131.277,93.745 120.453,104.569 ; U2.20@148.28,113.88 U2.20@148.304,113.904 ; U2.20@148.304,113.957 U2.20@148.304,113.904 ; v1@148.38,111.06 148.37,111.07 148.37,112.84 148.304,112.906 U2.20@148.304,113.904 ; v1(161.02,130.67) v1@161.06,130.504 ; U3.20@161.52,135.24 161.52,132.66 161.06,132.2 161.06,129.6 148.31,116.85 148.31,113.91 U2.20@148.304,113.904 ; v1(173.83,119.83) 173.83,120.078 187.93,134.178 U5.20@187.93,135.68 ; v1@173.84,119.83 173.84,118.287 174.72,117.407 U4.20@174.72,113.957
  Mid-Layer 1 w0.254: v1(135.49,92.58) 135.49,93.093 134.863,93.72 134.863,94.24 135.476,94.853 135.62,94.853 141.793,101.026 141.793,103.98 148.415,110.602 148.415,110.975 v1@148.33,111.06
  Bottom Layer w0.254: v1(161.02,130.67) 161.069,130.621 161.069,129.569 166.914,123.724 170.065,123.724 v1@173.874,119.914
  other v1: 148.38,111.08
A.6: U1.121 U2.19 U3.19 U4.19 U5.19 U6.43 U7.43 | length 143.7
  Top Layer w0.254: U1.121@106.548,115.646 v1@108.796,115.646 ; v1@113.788,115.837 114.425,115.2 U6.43@120.453,115.2 121.26,115.2 121.699,114.761 121.699,104.123 131.277,94.545 131.964,94.545 U7.43@132.137,94.372 U7.43@132.31,94.199 ; U7.43@132.885,94.365 133.98,93.27 v1(134.2,93.27) v1@134.23,93.27 ; U2.19@148.79,113.98 148.79,116.67 161.73,129.61 161.73,132.07 162.01,132.35 U3.19@162.01,134.942 ; 148.852,113.208 148.852,112.578 149.05,112.37 v1(149.07,112.37) ; v1(174.54,118.54) 174.603,118.603 174.603,120.209 188.42,134.026 U5.19@188.42,135.33 ; v1@174.56,118.52 174.56,118.35 175.22,117.69 U4.19@175.22,113.957
  Mid-Layer 1 w0.254: v1(134.2,93.27) 134.2,93.783 133.573,94.41 133.573,96.93 133.94,97.297 133.944,97.297 147.753,111.106 147.753,111.34 148.12,111.707 148.357,111.707 v1@149.04,112.39
  Bottom Layer w0.254: v1(109.005,115.81) 113.535,115.81 v1@113.6,115.875 ; v1(161.71,131.96) 161.71,129.57 167.102,124.178 170.369,124.178 174.457,120.09 174.457,118.613 v1@174.53,118.54
  other v1: 113.675,115.85
A.7: U1.127 U2.18 U3.18 U4.18 U5.18 U6.42 U7.42 | length 143.4
  Top Layer w0.254: U1.127@106.548,118.646 108.297,118.646 109.04,117.903 109.922,117.903 v1@109.955,117.87 ; v1@109.87,117.87 v1@109.955,117.87 ; v1(109.96,117.86) v1@109.96,117.865 ; v1@109.975,117.85 v1@109.96,117.865 ; v1@118.52,116 U6.42@120.453,116 ; U6.42@120.67,116.01 121.672,116.01 122.153,115.529 122.153,104.469 131.277,95.345 131.964,95.345 U7.42@132.137,95.172 132.824,95.172 133.364,94.632 133.364,94.619 133.94,94.043 v1@135.44,94.043 ; U2.18@149.304,113.957 149.306,113.955 149.306,113.021 149.697,112.63 149.697,111.143 v1@149.74,111.1 ; U2.18@149.33,113.95 149.33,116.4 162.53,129.6 162.53,131.653 162.483,131.7 162.483,132.22 162.53,132.267 U3.18@162.53,134.92 ; v1@162.337,130.753 v1@162.41,130.826 ; v1(175.23,119.83) 175.23,120.194 188.93,133.894 U5.18@188.93,135.38 ; v1@175.24,119.83 175.24,118.32 175.72,117.84 U4.18@175.72,113.957 ; v1@109.955,117.87 v1@109.96,117.865 ; v1@109.955,117.87 109.96,117.87 v1@109.96,117.865
  Mid-Layer 1 w0.254: v1(135.49,93.98) 146.473,104.963 146.473,107.653 v1@149.84,111.02
  Mid-Layer 2 w0.254: v1@110.01,117.87 110.655,117.225 115.35,117.225 116.525,116.05 118.47,116.05 v1(118.5,116.02)
  Bottom Layer w0.254: v1(162.42,130.67) 162.42,129.502 167.29,124.632 170.557,124.632 175.27,119.919 v1@175.27,119.85
  other v1: 149.78,111.08
A.8: U1.131 U2.8 U3.8 U4.8 U5.8 U6.27 U7.27 | length 147.8
  Top Layer w0.254: U1.131@106.875,120.669 108.917,120.669 116.248,128 U6.27@120.453,128 127.017,128 127.893,127.124 127.893,110.729 131.277,107.345 131.964,107.345 U7.27@132.137,107.172 134.038,107.172 v1@134.23,106.98 ; U2.8@154.3,113.9 154.3,116.812 167.119,129.631 ; v1@154.304,112.61 U2.8@154.304,113.957 ; 167.13,129.65 167.13,132.167 167.512,132.549 U3.8@167.512,135.351 ; v1(180.46,118.52) 180.46,120.287 193.92,133.747 U5.8@193.92,135.994 ; v1@180.48,118.44 180.72,118.2 U4.8@180.72,113.957
  Mid-Layer 2 w0.254: v1(134.26,107.05) 140.486,113.276 153.504,113.276 v1@154.16,112.62
  Bottom Layer w0.254: v1(167.12,130.67) 167.12,128.908 168.672,127.356 173.091,127.356 180.377,120.07 180.377,118.583 v1@180.57,118.39
  other v1: 154.18,112.57
A.9: U1.135 U2.7 U3.7 U4.7 U5.7 U6.26 U7.26 | length 148.8
  Top Layer w0.254: U1.135@107.1,122.669 107.793,122.669 113.924,128.8 U6.26@120.453,128.8 127.233,128.8 128.347,127.686 128.347,111.075 131.277,108.145 131.964,108.145 U7.26@132.137,107.972 133.822,107.972 v1@134.27,108.42 ; U2.7@154.804,113.957 154.804,113.218 155.117,112.905 155.135,112.905 v1@155.46,112.58 ; U2.7@154.83,113.94 154.83,116.7 167.81,129.68 v1(167.81,131.96) ; v1@167.8,131.96 168.012,132.172 U3.7@168.012,135.351 ; v1(181.15,119.81) 181.15,120.335 194.42,133.605 U5.7@194.42,136.064 ; v1@181.15,119.82 181.22,119.75 U4.7@181.22,113.957
  Mid-Layer 2 w0.254: v1(134.26,108.45) 139.54,113.73 154.49,113.73 v1@155.54,112.68
  Bottom Layer w0.254: v1(167.81,131.96) 167.893,131.877 167.81,131.794 167.81,128.86 168.86,127.81 173.279,127.81 181.2,119.889 v1@181.2,119.74
  other v1: 155.58,112.57
A.10: U1.145 U2.6 U3.6 U4.6 U5.6 U6.25 U7.25 | length 166.2
  Top Layer w0.254: U1.145@106.825,127.669 111.919,127.669 113.85,129.6 U6.25@120.453,129.6 127.651,129.6 128.801,128.45 128.801,111.421 131.277,108.945 131.964,108.945 U7.25@132.137,108.772 ; U2.6@155.3,114.02 155.3,116.528 168.512,129.74 v1@168.512,130.662 ; v1@168.5,130.65 v1@168.512,130.662 ; U3.6@168.512,135.351 v1@168.512,130.662 ; U4.6@181.72,113.987 181.72,118.33 181.88,118.46 v1@181.88,118.51 ; v1(181.86,118.52) 181.86,120.403 194.93,133.473 U5.6@194.93,136.12
  Mid-Layer 1 w0.254: v1(133.2,108.8) 133.52,108.8 134.23,109.51 134.23,109.523 134.597,109.89 134.597,110.726 133.873,111.45 133.873,112.083 145.15,123.36 161.3,123.36 v1@168.64,130.7
  Bottom Layer w0.254: v1(168.52,130.67) 168.52,129.12 169.376,128.264 173.583,128.264 181.777,120.07 181.777,118.533 v1@181.89,118.42
A.11: U1.149 U2.5 U3.5 U4.5 U5.5 U6.24 U7.24 | length 167
  Top Layer w0.254: U1.149@107.35,129.623 107.396,129.669 112.528,129.669 113.259,130.4 U6.24@120.453,130.4 127.919,130.4 129.255,129.064 129.255,111.767 131.277,109.745 131.964,109.745 U7.24@132.137,109.572 133.452,109.572 v1@134.04,110.16 ; U2.5@155.79,113.96 155.79,116.376 169.197,129.783 ; U3.5@169.012,135.351 169.012,132.148 169.202,131.958 169.202,129.788 ; U4.5@182.22,113.957 182.22,117.7 182.53,118.01 v1@182.53,119.78 ; v1(182.55,119.81) 182.55,120.451 195.43,133.331 U5.5@195.43,135.99
  Mid-Layer 1 w0.254: v1(133.97,110.15) 133.419,110.701 133.419,112.329 144.904,123.814 159.384,123.814 166.493,130.923 166.493,130.93 166.896,131.333 168.603,131.333 169.18,131.91 v1@169.19,131.91
  Bottom Layer w0.254: v1(169.21,131.96) 169.21,129.088 169.58,128.718 173.771,128.718 182.231,120.258 182.242,120.258 182.58,119.92 v1@182.58,119.8
A.12: U1.155 U2.4 U3.4 U4.4 U5.4 U6.23 U7.23 | length 179.2
  Top Layer w0.254: U1.155@106.548,132.646 111.071,132.646 v1@116.925,138.5 ; U6.23@120.453,131.2 128.262,131.2 ; v1@122.2,138.525 122.2,137.262 128.262,131.2 ; v1@134.45,111.67 133.152,110.372 U7.23@132.137,110.372 131.564,110.372 129.709,112.227 129.709,129.753 128.262,131.2 ; U2.4@156.32,113.89 156.32,116.264 169.898,129.842 ; U3.4@169.512,135.351 169.512,132.551 169.93,132.133 169.93,129.88 ; U4.4@182.72,113.957 182.72,117.52 183.22,118.02 v1@183.22,118.53 ; v1(183.26,118.52) 183.26,120.519 195.92,133.179 U5.4@195.92,135.94
  Mid-Layer 1 w0.254: v1(116.925,138.55) 122.05,138.55 v1@122.125,138.475 ; v1(134.5,111.71) 145.696,122.906 162.336,122.906 v1@170.02,130.59
  Bottom Layer w0.254: v1(169.92,130.67) 169.92,129.732 170.48,129.172 174.075,129.172 183.177,120.07 183.177,118.633 v1@183.33,118.48
  other v1: 122.15,138.5
A.13: U1.159 U2.3 U3.3 U4.3 U5.3 U6.22 U7.22 | length 188.3
  Top Layer w0.254: U1.159@103.7,135.575 103.7,136.625 v1(106.05,138.975) ; U6.22@131.853,131.2 133.467,131.2 143.7,120.967 143.7,110.504 U7.22@143.568,110.372 ; U7.22@143.537,110.372 U7.22@143.568,110.372 ; U7.22@143.58,110.36 U7.22@143.568,110.372 ; U2.3@156.79,113.77 156.79,112.44 154.722,110.372 U7.22@143.568,110.372 ; U2.3@156.82,113.95 156.82,116.122 170.609,129.911 170.609,132.101 170.012,132.698 U3.3@170.012,135.351 ; U4.3@183.22,113.957 183.22,117.32 183.91,118.01 v1@183.91,119.84 ; v1(183.95,119.81) 183.95,120.567 196.44,133.057 U5.3@196.44,135.88
  Mid-Layer 2 w0.254: v1@106.025,139 108.65,136.375 145.545,136.375 149.2,132.72 169.85,132.72 v1(170.61,131.96)
  Bottom Layer w0.254: v1(170.61,131.96) 170.61,130.096 171.08,129.626 174.263,129.626 v1@183.964,119.924
A.14: U1.173 U2.2 U3.2 U4.2 U5.2 U6.21 U7.21 | length 200.4
  Top Layer w0.2: v1@96.275,138.35 96.698,137.927 U1.173@96.698,134.996 ; U6.21@131.853,130.4 133.663,130.4 143.25,120.813 143.25,111.534 142.337,110.621 142.337,110.123 142.688,109.772 U7.21@143.337,109.772 ; U7.21@143.537,109.572 154.526,109.572 157.29,112.336 U2.2@157.29,113.64 ; U2.2@157.28,113.98 157.28,115.978 171.321,130.019 171.321,132.109 170.512,132.918 U3.2@170.512,135.351 ; U4.2@183.72,113.957 183.72,117.18 184.64,118.1 v1@184.64,118.51 ; v1(184.66,118.52) 184.66,120.673 196.93,132.943 U5.2@196.928,135.801 ; U5.2@196.9,135.91 U5.2@196.93,135.88
  Mid-Layer 2 w0.2: v1@108.225,138.575 109.495,138.575 110.54,137.53 145.6,137.53 149.64,133.49 169.929,133.49 171.21,132.209 v1@171.21,130.78
  Bottom Layer w0.2: v1(96.28,138.35) 96.55,138.62 100.579,138.62 100.849,138.35 107.975,138.35 v1@108.15,138.525 ; v1(171.32,130.67) 171.937,130.053 174.556,130.053 184.64,119.969 v1@184.64,118.76
  other v1: 108.2,138.525
A.15: U1.101 U2.1 U3.1 U4.1 U5.1 U6.20 U7.20 | length 174.2
  Top Layer w0.2: U1.101@103.198,105.796 103.248,105.846 103.248,106.882 103.512,107.146 105.653,107.146 106.9,105.899 106.9,104.65 110.625,100.925 122.75,100.925 v1@129.35,94.325 ; U6.20@131.853,129.6 133.897,129.6 142.375,121.122 142.375,111.224 141.937,110.786 141.937,109.723 142.688,108.972 U7.20@143.337,108.972 ; U7.20@143.537,108.772 154.292,108.772 157.82,112.3 U2.1@157.82,113.31 ; U2.1@157.83,114.05 157.83,115.962 172.03,130.162 ; U3.1@171.012,135.351 171.012,132.998 172.03,131.98 172.03,130.162 ; 172.03,130.15 172.03,130.162 ; U4.1@184.22,113.957 184.22,117.114 185.26,118.154 185.26,119.67 v1@185.35,119.76 ; v1(185.35,119.81) 185.35,120.798 197.43,132.878 U5.1@197.43,135.85
  Mid-Layer 1 w0.2: v1(129.35,94.425) 129.35,99.575 v1@142.275,112.5
  Bottom Layer w0.2: v1(172.01,131.96) 173.517,130.453 174.721,130.453 185.344,119.83 v1@185.37,119.83
  other v1: 142.325,112.575